# Altium PCB dtb-222-AW1.PcbDoc
Units mm, origin at the board's own origin, x right, y up, seen from the top; angles counter-clockwise.
Board outline 144.78 x 140.44 mm, 4 copper layers (Top Layer, Ground, Layer 2, Bottom Layer), stack 1.544 mm thick; 51 components, 62 nets, 219 pads, 11 vias.
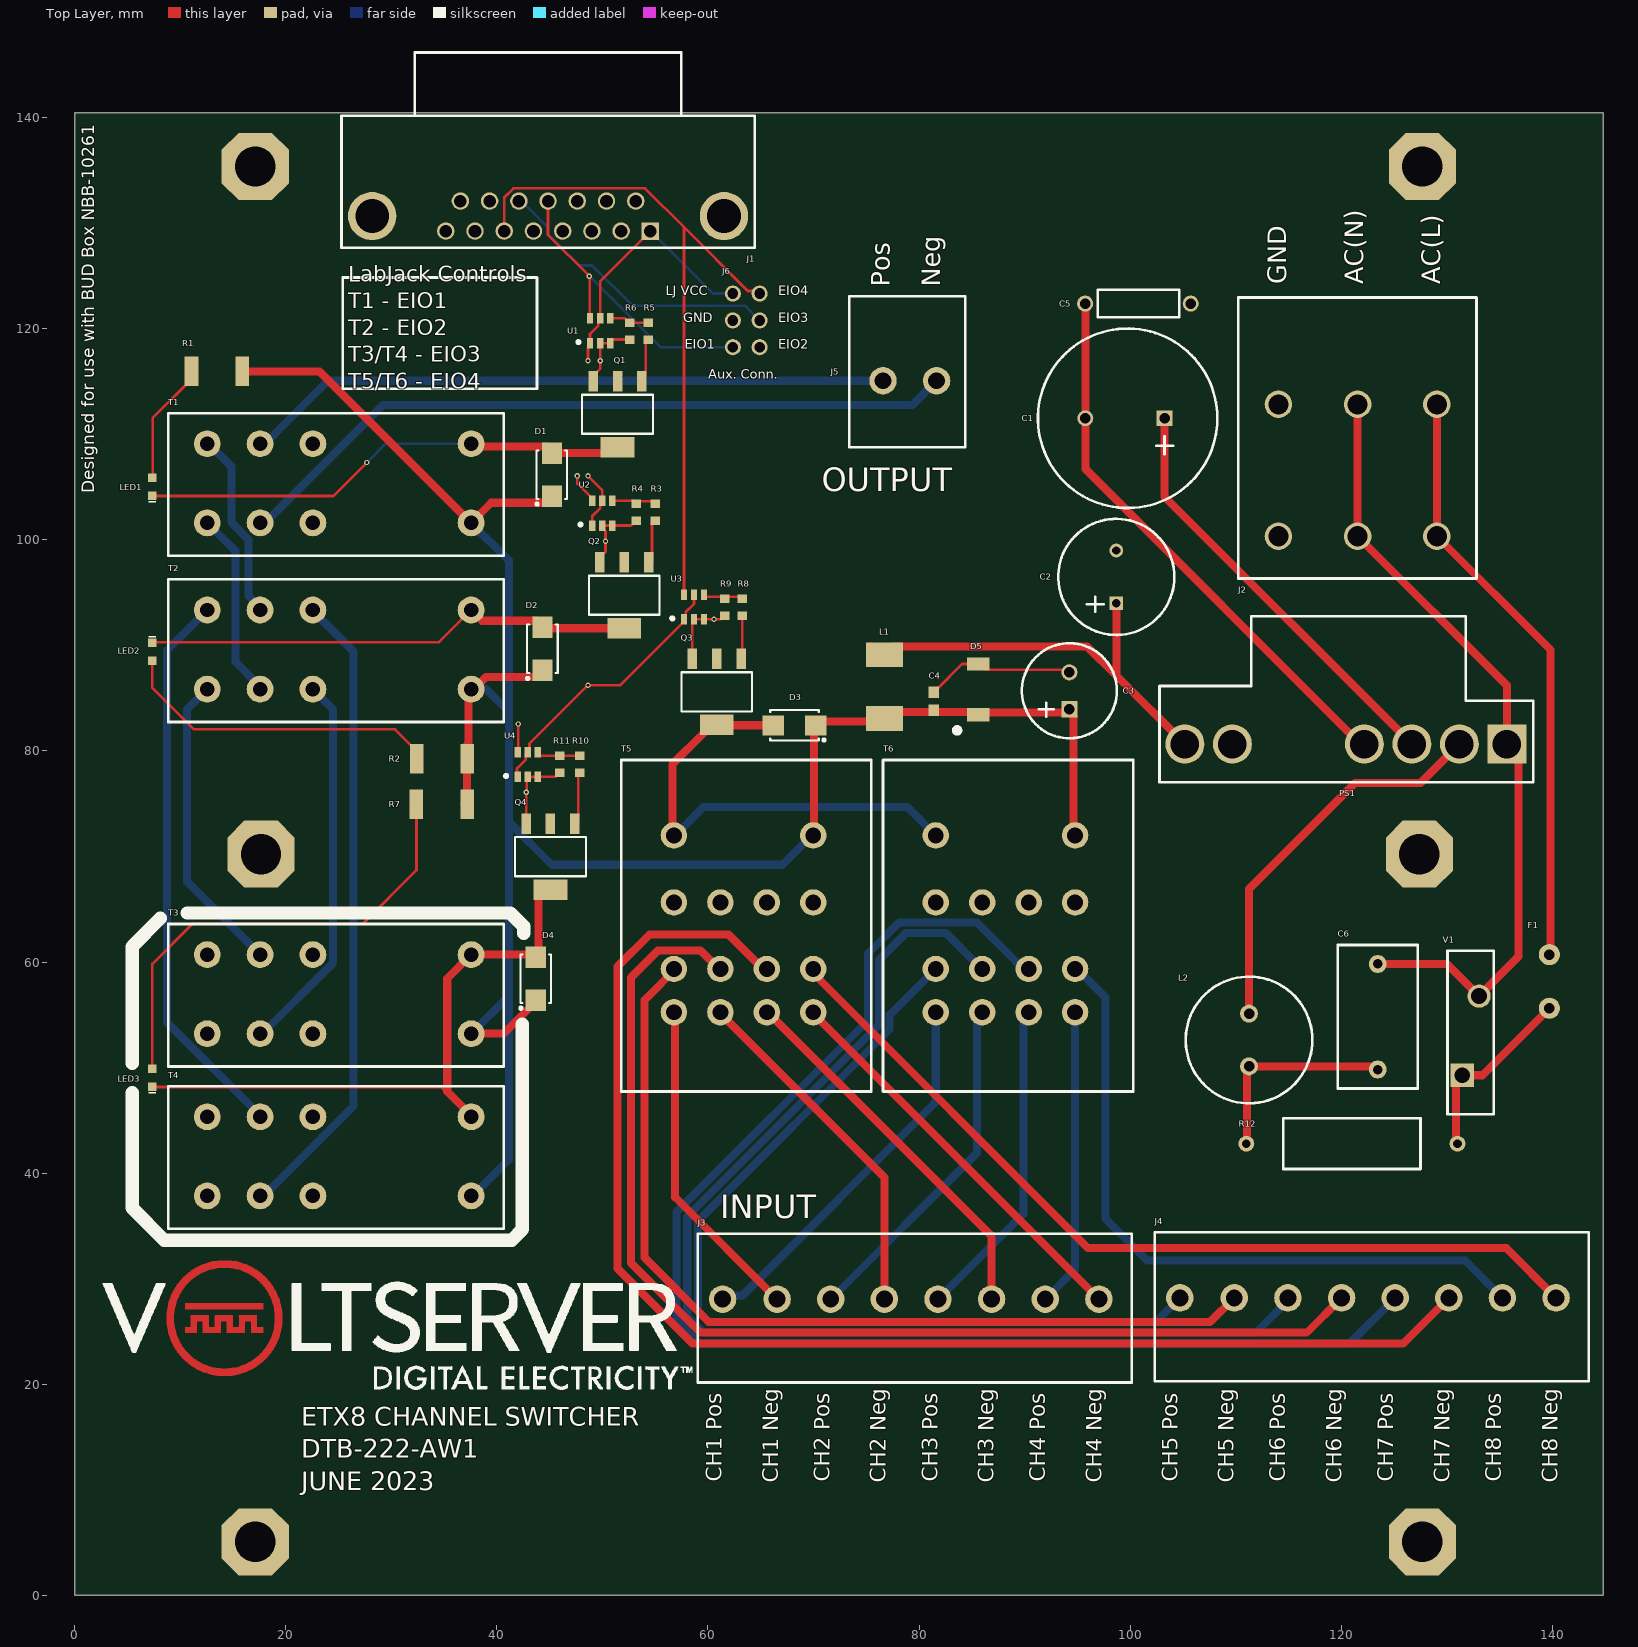
[diagram p0: Top Layer view]
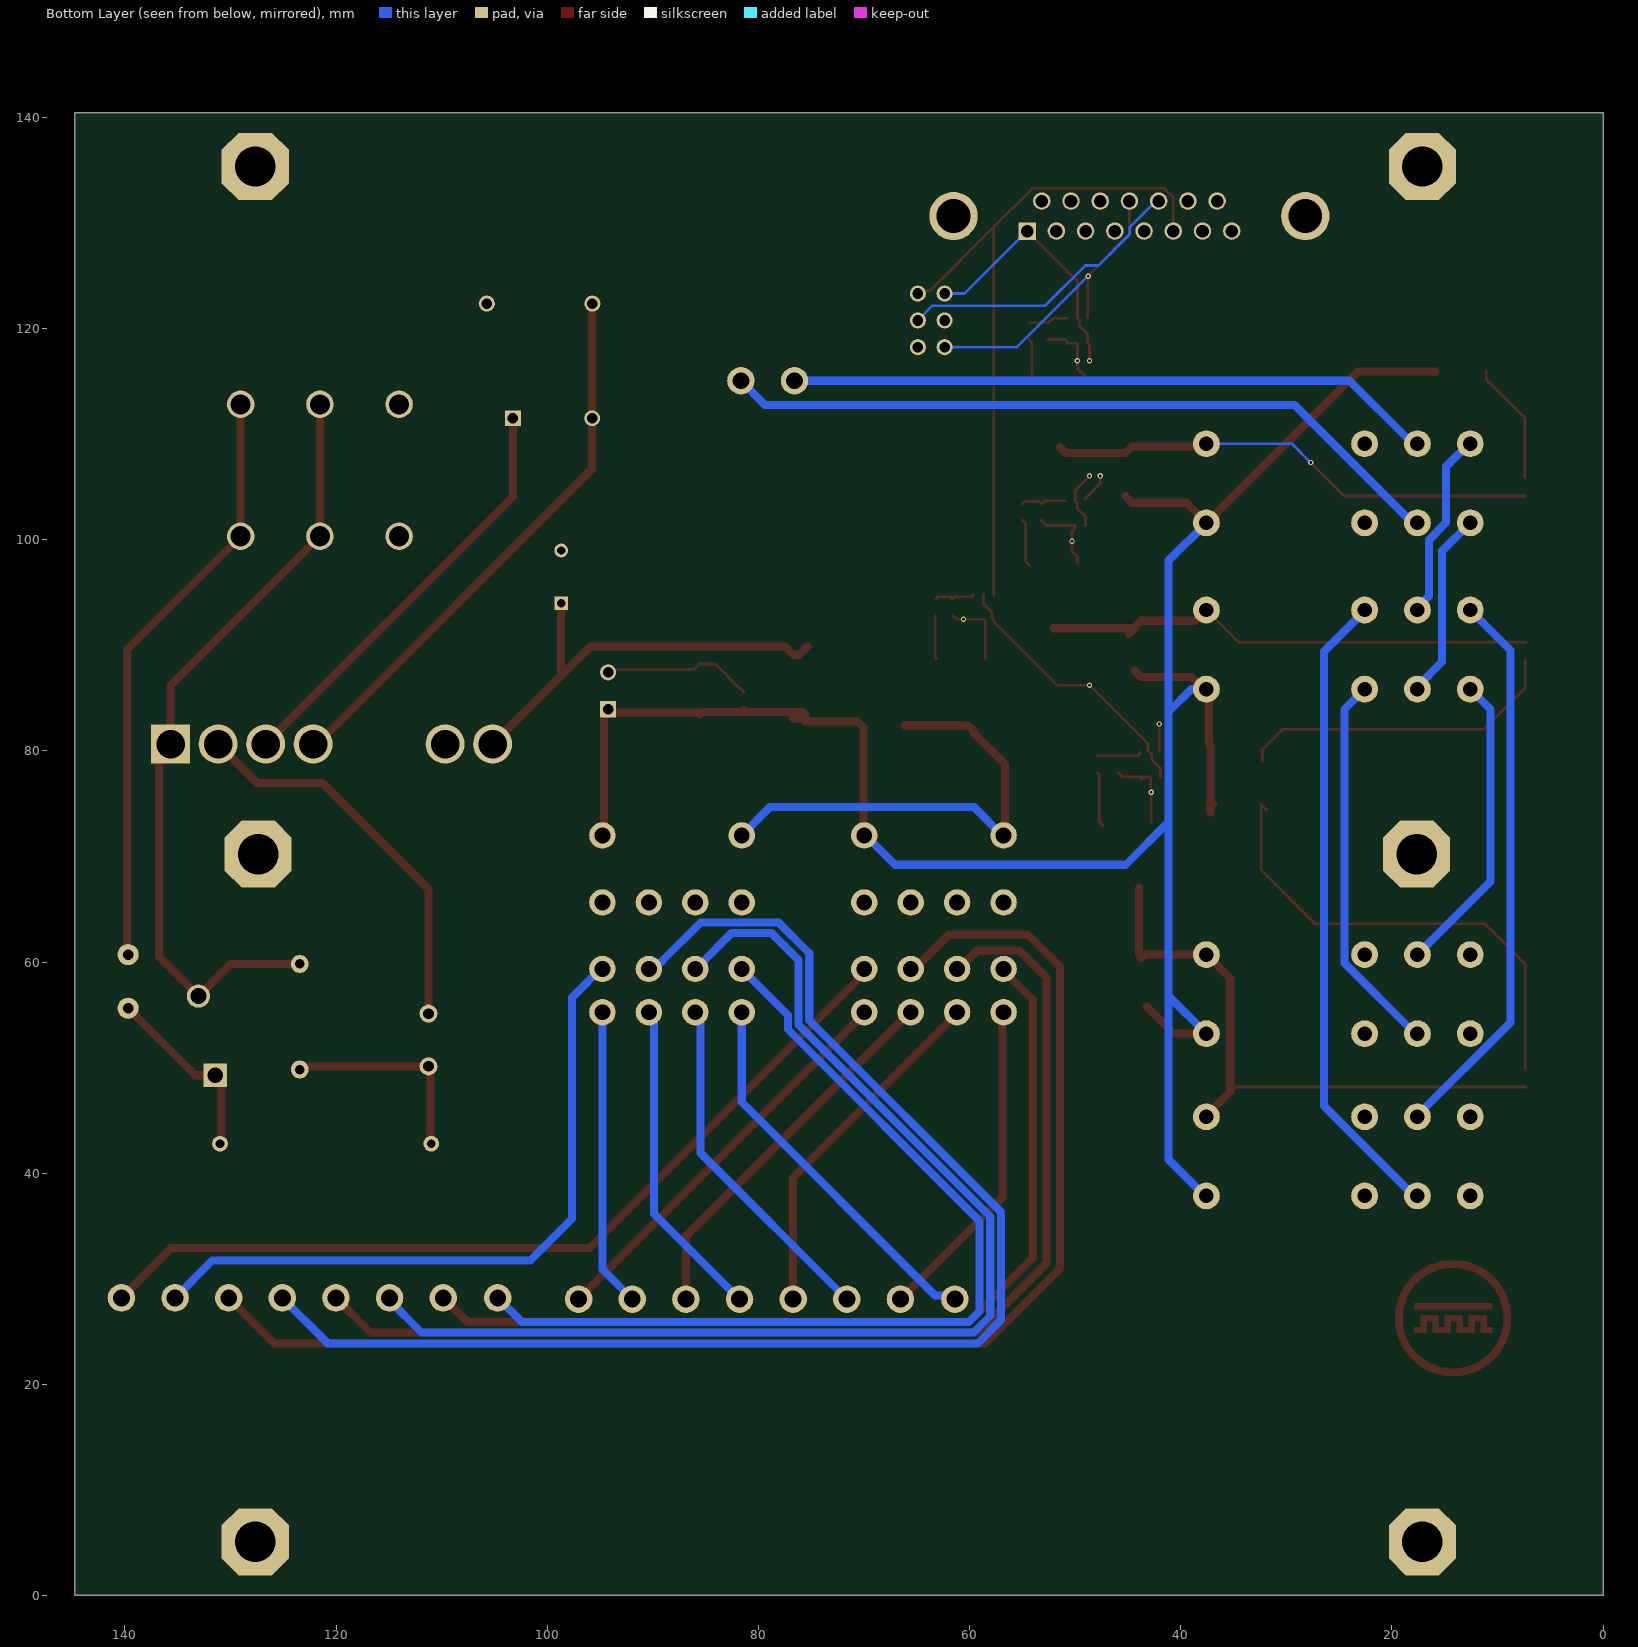
[diagram p1: Bottom Layer view, seen from below]
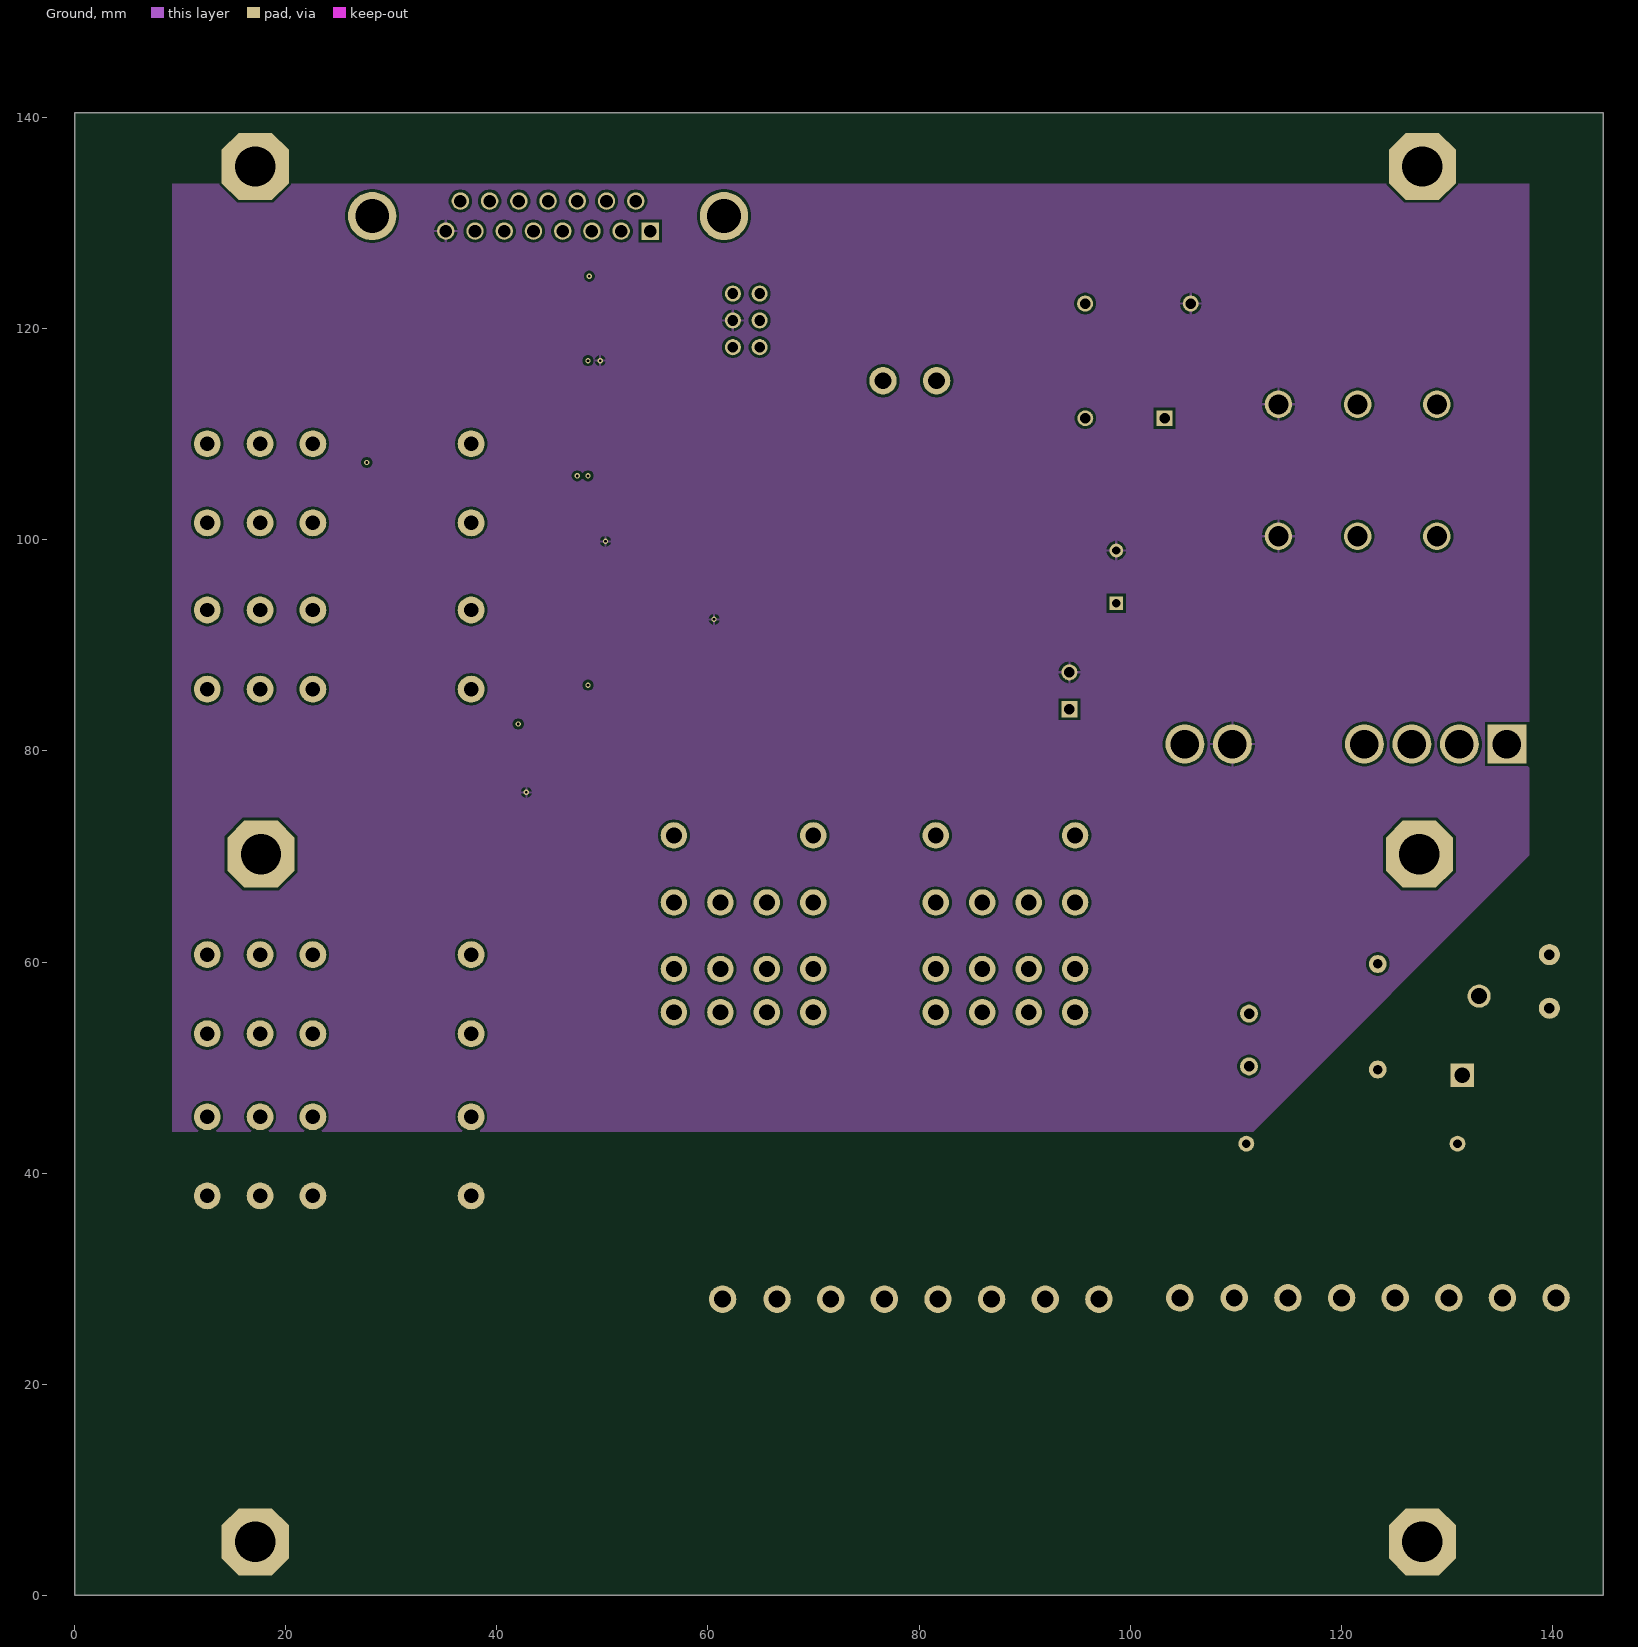
[diagram p2: Ground]
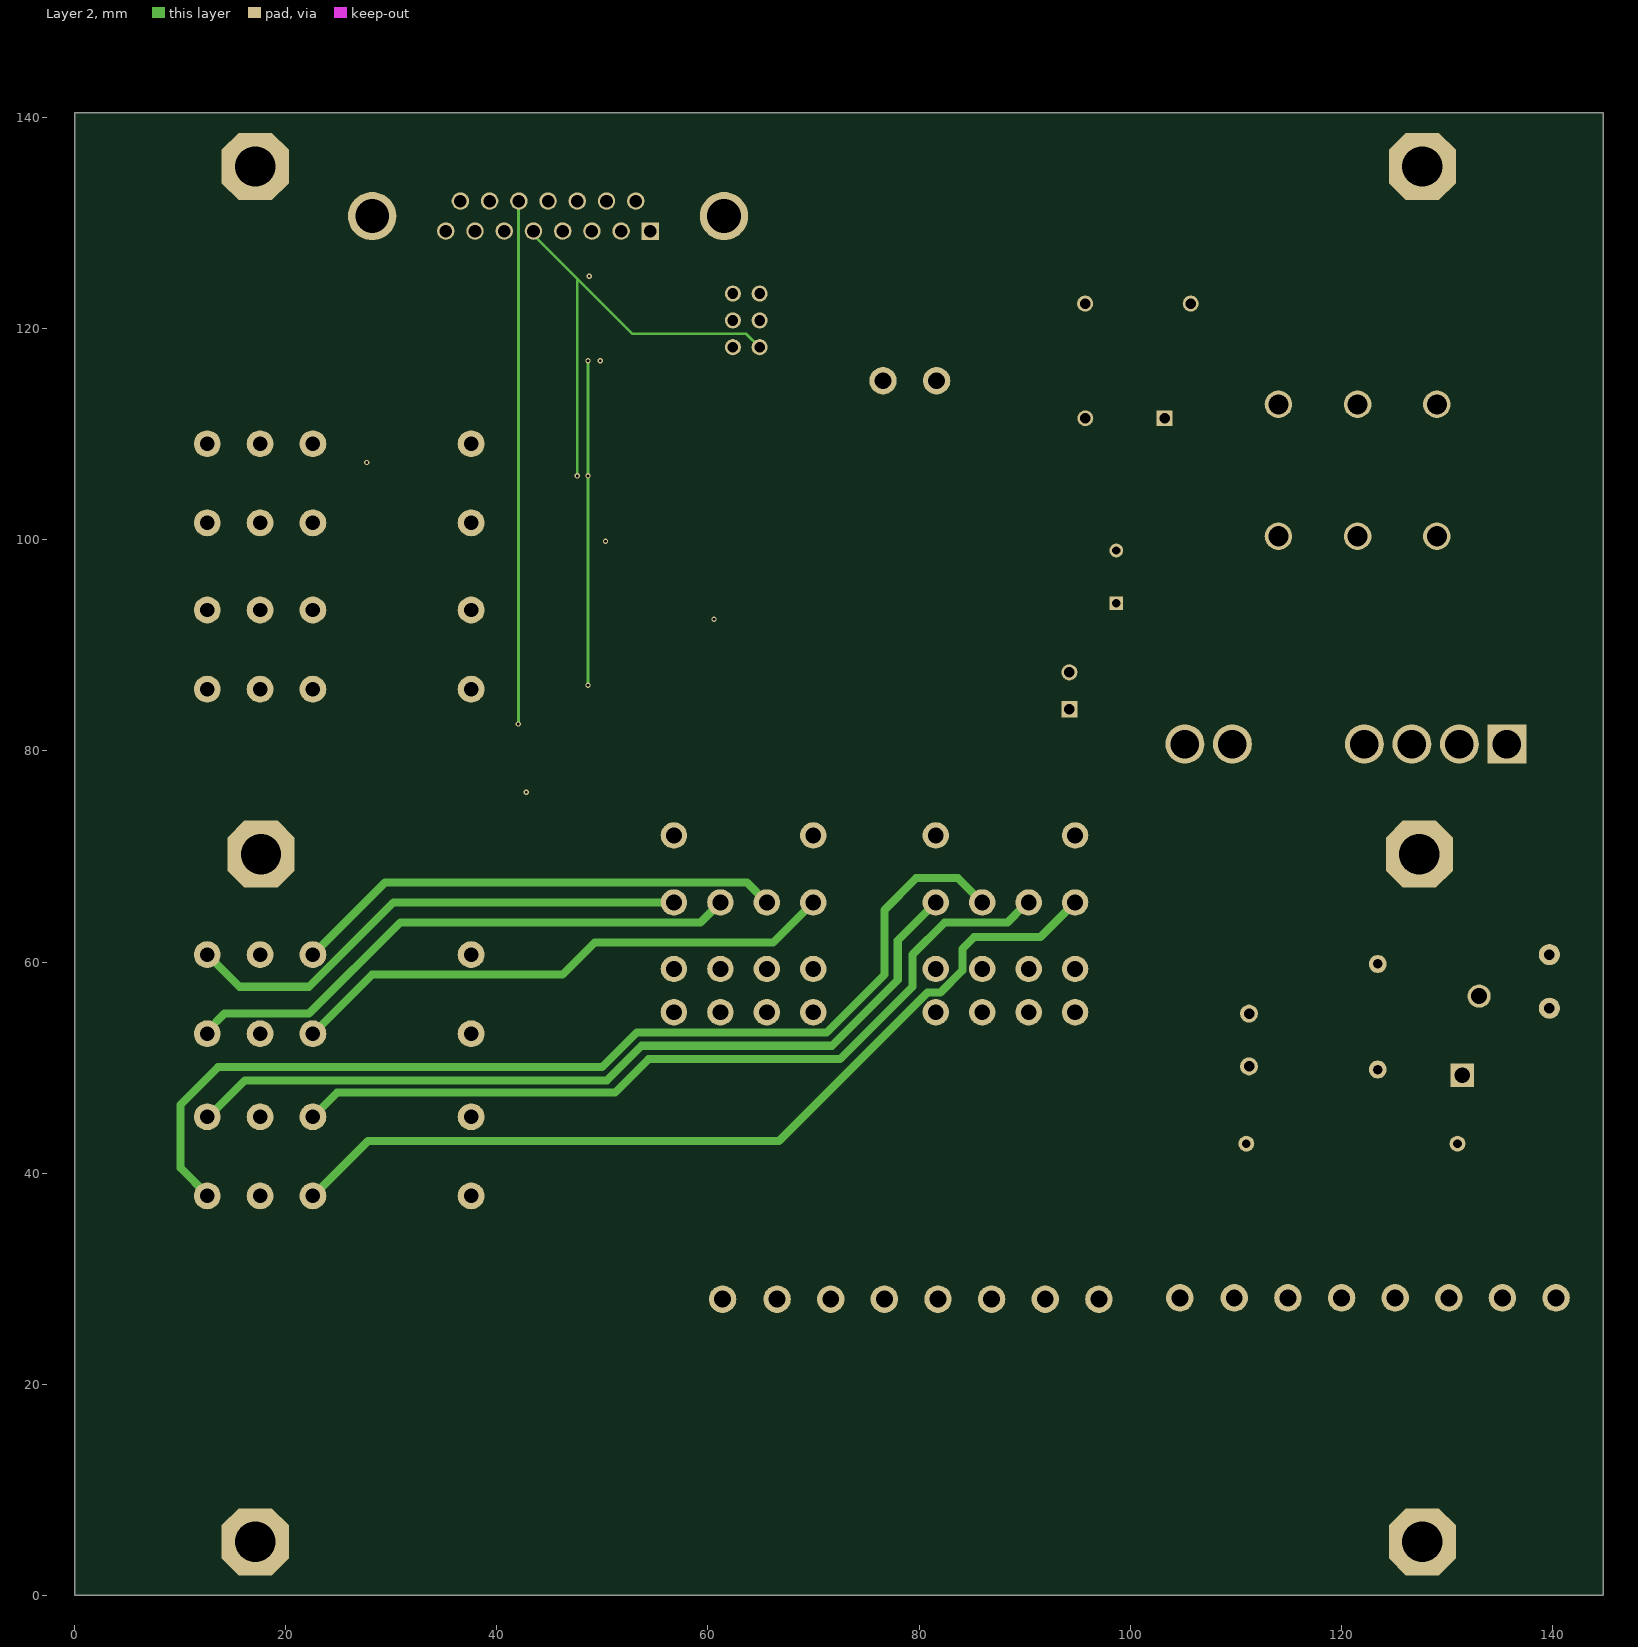
[diagram p3: Layer 2]
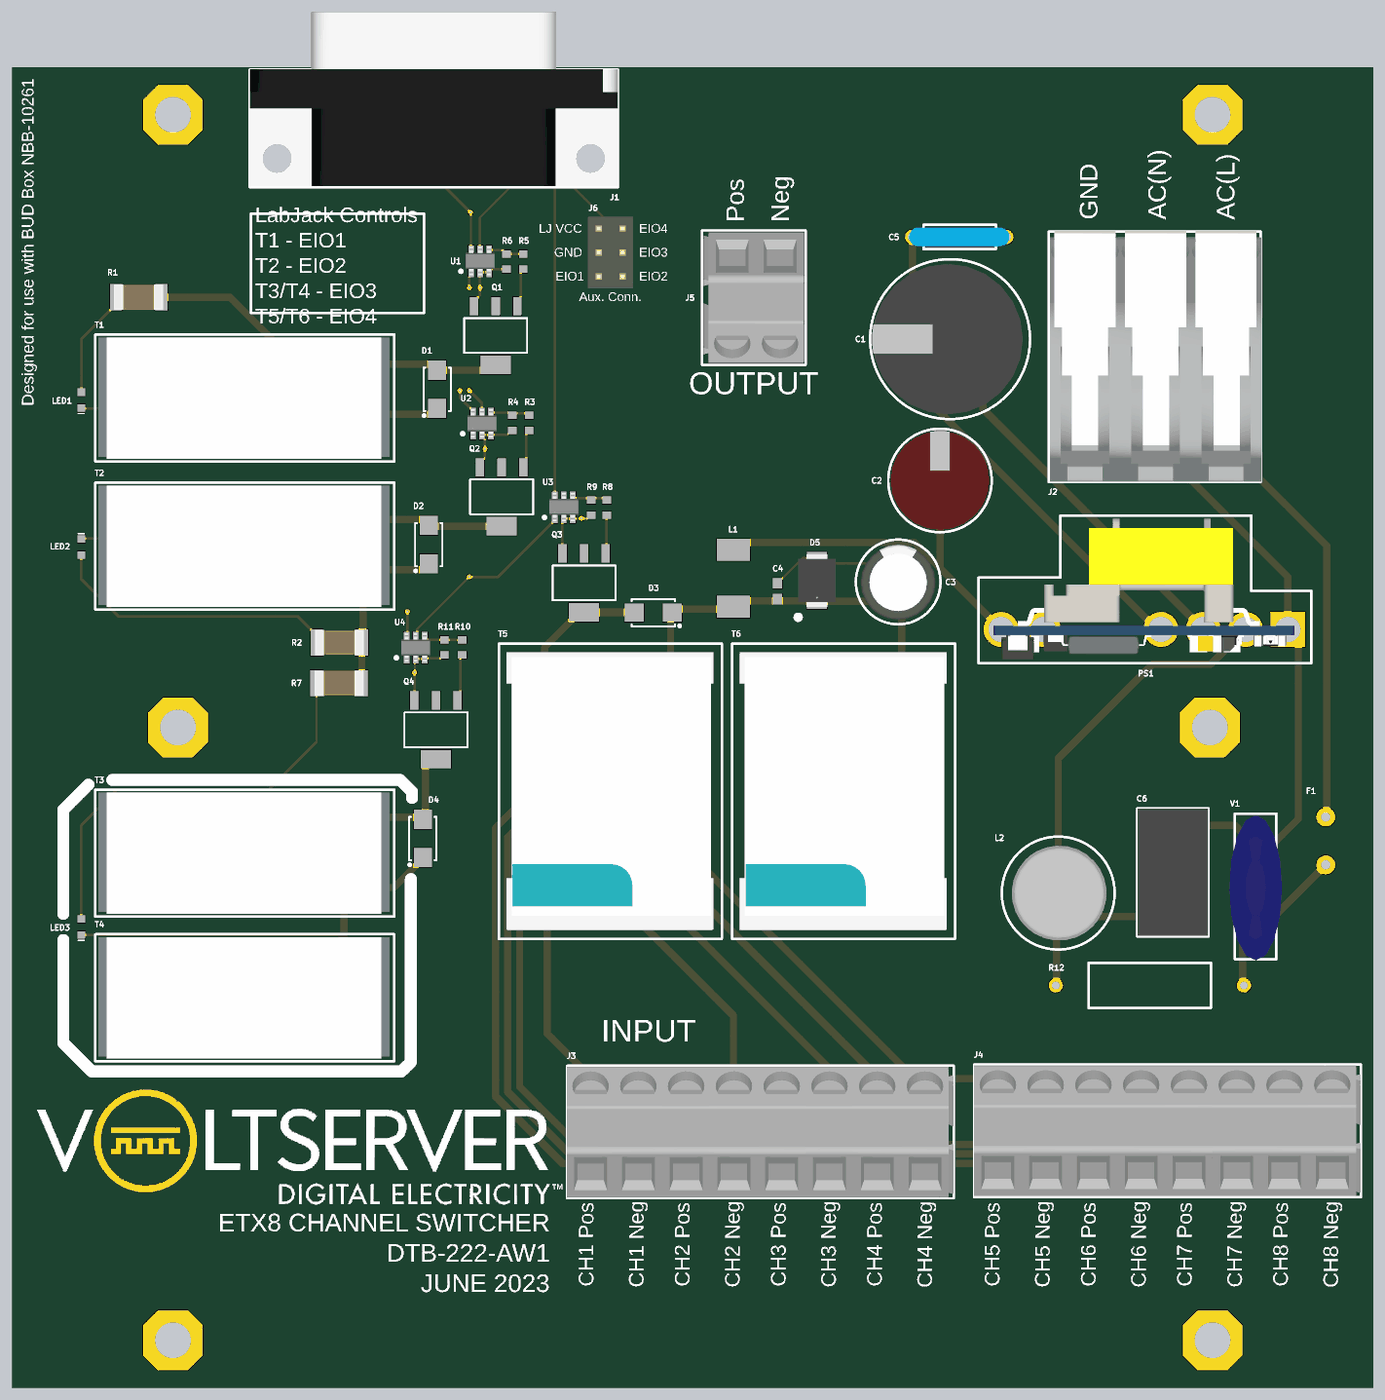
[diagram p4: 3D render of the assembled board from above, using the file's embedded part models]

## Layer stack, top to bottom
Top Solder: solder mask 0.0102, Solder Resist, Dk 3.5
Top Layer: signal copper 0.0356
Dielectric 2: prepreg 0.2311, PP-006, Dk 4.1
Ground: signal copper 0.0356
Dielectric 1: dielectric 0.9398, FR-4, Dk 4.8
Layer 2: signal copper 0.0356
Dielectric 3: prepreg 0.2311, PP-006, Dk 4.1
Bottom Layer: signal copper 0.0356
Bottom Solder: solder mask 0.0102, Solder Resist, Dk 3.5

## Board outline
0,0 0,140.437 144.78,140.437 144.78,0

## Design rules (kind name [scope] priority, off if disabled: settings)
Clearance [All] p1: gap=0.254 ignorepadtopadclearanceinfootprint=FALSE except(0: Arc-Hole Track-Hole SMDPad-Hole THPad-Hole Via-Hole Fill-Hole Poly-Hole Region-Hole Text-Hole)
Height [All] p1: minheight=0 maxheight=50.8 prefheight=12.7
HoleSize [All] p1: absolutevalues=TRUE maxlimit=5.08 minlimit=0.025 maxpercent=80.000 minpercent=20.000
MinimumSolderMaskSliver [All] p1: minsoldermaskwidth=0.127
PolygonConnect [All] p1: connectstyle=Relief reliefconductorwidth=0.254 reliefentries=4 polygonreliefangle="90 Angle" airgapwidth=0.254
RoutingVias [All] p1: holewidth=0.254 width=0.508 viastyle="Through Hole" minholewidth=0.254 minwidth=0.508 maxholewidth=0.711 maxwidth=1.27
SilkToSilkClearance [All] p1: silktosilkclearance=0.127
SilkToSolderMaskClearance [IsPad] p1: minsilkscreentomaskgap=0.127 clearancetoexposedcopper=TRUE
SolderMaskExpansion [All] p1: expansion=0.102 istentingtop=FALSE
Width [All] p1: maxlimit=1.27 minlimit=0.254 preferedwidth=0.254
25 further rules are at their usual default settings.

## Classes and differential pairs
component class dtb-222-relays: D1 D2 D3 D4 LED1 LED2 LED3 Q1 Q2 Q3 Q4 R1 R2 R3 R4 R5 R6 R7 R8 R9 R10 R11 T1 T2 T3 T4 T5 T6 U1 U2 U3 U4
component class dtb-222-connectors: J1 J2 J3 J4 J5 J6
component class dtb-222-24V-supply: C1 C2 C3 C4 C5 C6 D5 F1 L1 L2 PS1 R12 V1

## Components (designator, comment, footprint, x,y, rotation, side; value= is the part's Value field where it differs from the comment)
C1 "ECA-2WHG220" ECA-2WHG220 103.251,111.506 r180 top value="22 uF 450V"
C2 "35PX470MEFC10X12.5" 35PX470MEFC10X12.5 98.679,93.98 r90 top value="470 uF 35V"
C3 "ECA-1HM101B" ECA-1HM101B 94.234,83.947 r90 top value="100 uF 50V"
C4 "CGA3E2X7R1H104K080AE" "Standard VoltServer 0603 Capacitor Footprint" 81.407,84.709 r270 top value="0.1uF 50V"
C5 "CAP CER 1000PF 440VAC RADIAL" CD45-E2GA102M-VKA 95.729,122.373 r0 top
C6 "CAP FILM 0.1UF 10%" 890334023023CS 123.444,49.817 r90 top value="0.1 UF 310 VAC"
D1 "ES1J" ES1J 45.212,106.172 r90 top value="600V 1A"
D2 "ES1J" ES1J 44.323,89.662 r90 top value="600V 1A"
D3 "ES1J" ES1J 68.199,82.423 r180 top value="600V 1A"
D4 "ES1J" ES1J 43.688,58.42 r90 top value="600V 1A"
D5 "TVS DIODE 30VWM 48.4VC SMB" SMBJ30A 85.598,83.439 r90 top value="TVS Diode 30VWM"
F1 "2 A 300 V AC DC" SS-5H-2A-APH 139.7,60.706 r270 top value="FUSE BOARD MNT 2A 300VAC RADIAL"
J1 "DB15 Horizontal" 182-015-113R531 54.546,129.235 r180 top value="DB 16 Male"
J2 "2706-103" 2706-103 129.039,112.83 r180 top value="3-Pos Terminal Block Horizontal"
J3 "8 Pos Terminal Block Screw Type" TB008A-508-08BE 97.028,28.067 r180 top value="8 pos screw terminal"
J4 "8 Pos Terminal Block Screw Type" TB008A-508-08BE 140.335,28.194 r180 top value="8 pos screw terminal"
J5 "2 Pos Terminal Block Screw Type" TB008A-508-02BE 76.581,115.062 r0 top value="2 pos screw terminal"
J6 "6POS 0.100' Header" 67997-206HLF 62.357,123.317 r270 top value="CONN HEADER VERT 6POS 2.54MM"
L1 "FIXED IND 2.2UH 9.3A 15MOHM SMD" 0630CDMCCDS-2R2MC 76.708,89.108 r270 top value="2.2uH 9.3A"
L2 "FIXED IND 2.2MH 350MA 3.2 OHM TH" RLB1112V4-222J 111.252,50.118 r90 top value="2.2mH 350mA"
LED1 "APT1608LVBC/D" "Standard VoltServer 0603 Kingbright HELI2 LED Footprint" 7.366,105.029 r270 top locked value=Blue
LED2 "APT1608LVBC/D" "Standard VoltServer 0603 Kingbright HELI2 LED Footprint" 7.366,89.408 r90 top locked value=Blue
LED3 "APT1608LVBC/D" "Standard VoltServer 0603 Kingbright HELI2 LED Footprint" 7.366,49.022 r270 top locked value=Blue
PS1 "AC/DC CONVERTER 24V 10W" LS10-13B24R3 135.674,80.645 r180 top
Q1 "FQT1N60CTF-WS" FQT1N60CTF_WS 51.435,111.887 r270 top value="600V 200mA"
Q2 "FQT1N60CTF-WS" FQT1N60CTF_WS 52.07,94.742 r270 top value="600V 200mA"
Q3 "FQT1N60CTF-WS" FQT1N60CTF_WS 60.833,85.598 r270 top value="600V 200mA"
Q4 "FQT1N60CTF-WS" FQT1N60CTF_WS 45.085,69.977 r270 top value="600V 200mA"
R1 "RES 1.2K OHM 5% 3/4W 2010" "2010 Resistor" 11.074,115.951 r0 top value="1.2 kOhm, +/- 5%, 0.75W"
R2 "RES 1.2K OHM 5% 3/4W 2010" "2010 Resistor" 32.41,79.248 r0 top value="1.2 kOhm, +/- 5%, 0.75W"
R3 "ERA-3AEB102V" "Standard VoltServer 0603 Resistor Footprint" 54.991,102.616 r90 top value="1K 0.1%"
R4 "ERA-3AEB203V" "Standard VoltServer 0603 Resistor Footprint" 53.213,102.616 r90 top value="20K 0.1%"
R5 "ERA-3AEB102V" "Standard VoltServer 0603 Resistor Footprint" 54.356,119.761 r90 top value="1K 0.1%"
R6 "ERA-3AEB203V" "Standard VoltServer 0603 Resistor Footprint" 52.578,119.761 r90 top value="20K 0.1%"
R7 "RES 1.2K OHM 5% 3/4W 2010" "2010 Resistor" 32.385,74.93 r0 top value="1.2 kOhm, +/- 5%, 0.75W"
R8 "ERA-3AEB102V" "Standard VoltServer 0603 Resistor Footprint" 63.246,93.599 r90 top value="1K 0.1%"
R9 "ERA-3AEB203V" "Standard VoltServer 0603 Resistor Footprint" 61.595,93.599 r90 top value="20K 0.1%"
R10 "ERA-3AEB102V" "Standard VoltServer 0603 Resistor Footprint" 47.879,78.74 r90 top value="1K 0.1%"
R11 "ERA-3AEB203V" "Standard VoltServer 0603 Resistor Footprint" 45.974,78.74 r90 top value="20K 0.1%"
R12 "RES 6.8 OHM 3W 5% AXIAL" AC03000006808JAC00 130.998,42.799 r180 top value="6.8 Ohm, 3 W"
T1 "RELAY DPDT 8A 24V" 2961435 37.567,109.093 r270 top locked value="DPDT Relay"
T2 "RELAY DPDT 8A 24V" 2961435 37.567,93.345 r270 top locked value="DPDT Relay"
T3 "RELAY DPDT 8A 24V" 2961435 37.567,60.706 r270 top locked value="DPDT Relay"
T4 "RELAY DPDT 8A 24V" 2961435 37.567,45.339 r270 top locked value="DPDT Relay"
T5 "4PDT Relay" 2903677 69.977,55.245 r180 top locked value="4PDT Relay with Socket"
T6 "4PDT Relay" 2903677 94.779,55.245 r180 top locked value="4PDT Relay with Socket"
U1 "1 x 2:1 MUX" 74LVC1G157GV,125 48.834,118.618 r90 top
U2 "1 x 2:1 MUX" 74LVC1G157GV,125 49.027,101.346 r90 top
U3 "1 x 2:1 MUX" 74LVC1G157GV,125 57.724,92.456 r90 top
U4 "1 x 2:1 MUX" 74LVC1G157GV,125 41.976,77.533 r90 top
V1 "VARISTOR DISC 14MM" B72214S0351K101 131.445,49.276 r90 top value="560 V 4.5 kA Varistor"

## Footprints (in the part's own frame and the unit in brackets; to place one, negate y for a bottom-side part, rotate by r counter-clockwise, add the part's x,y. Pads: shape width x height; smd on the part's side, far side on the other; paste and mask are expansions set on the pad)
35PX470MEFC10X12.5 [mm]
  rect 1.3x1.3 hole 0.8: 1(0,0)
  round 1.3 hole 0.8: 2(5,0)
  silkscreen extent -3,-5.5 8,5.5, body extent -2.75,-5.24 7.77,5.24, height 14.01
74LVC1G157GV,125 [mm] "1 x 2:1 MUX"
  rect 1x0.6 smd: 1(0,0) 2(0,-0.95) 3(0,-1.9) 4(2.35,-1.9) 5(2.35,-0.95) 6(2.35,0)
  silkscreen extent -0.04,0.96 0.24,1.24, body extent -0.3,-2.5 2.7,0.6, height 1.09
182-015-113R531 [mil] "DB15"
  round 180 hole 126: 0(-274.5,-56) 0(1037.5,-56)
  rect 65x65 hole 47: 1(0,0)
  round 65 hole 47: 2(109,0) 3(218,0) 4(327,0) 5(436,0) 6(545,0) 7(654,0) 8(763,0) 9(54.5,-112) 10(163.5,-112) 11(272.5,-112) 12(381.5,-112) 13(490.5,-112) 14(599.5,-112) 15(708.5,-112)
  silkscreen extent -389,-666 1152,62, body extent -389,-670 1152,58, height 494
0630CDMCCDS-2R2MC [mm]
  rect 2.35x3.5 smd: 1(0,0) 2(6.05,0)
  body extent -0.45,-3.4 6.65,3.2, height 2.8
"2010 Resistor" [mil]
  rect 51x110 smd: 1(0,0) 2(189,0)
  body extent -8,-53 197,53, height 28
2706-103 [mm]
  round 2.6 hole 1.9: 1(0,12.5) 1(0,0) 2(7.5,12.5) 2(7.5,0) 3(15,12.5) 3(15,0)
  silkscreen extent -3.75,-10.11 18.8,16.5, body extent -3.81,-10.16 18.69,16.47, height 25.5
67997-206HLF [mil]
  round 60 hole 40: 1(0,0) 2(100,0) 3(200,0) 4(200,100) 5(100,100) 6(0,100)
  body extent -48,-44 252,146, height 330
2903677 [mm] "4PDT Relay"
  round 2.5 hole 1.5: 1(0,-16.75) 2(13.2,-16.75) 3(0,-10.4) 4(4.4,-10.4) 5(8.8,-10.4) 6(13.2,-10.4) 7(0,-4.1) 8(4.4,-4.1) 9(8.8,-4.1) 10(13.2,-4.1) 11(0,0) 12(4.4,0) 13(8.8,0) 14(13.2,0)
  silkscreen extent -5.5,-23.9 18.2,7.5, body extent -4.6,-22.95 17.4,6.55, height 47.85
2961435 [mil] "2961435 Relay with R95-132 Socket"
  round 100 hole 54: 1(0,0) 2(0,-590) 3(0,-787) 4(0,-984) 5(295,-984) 6(295,-787) 7(295,-590) 8(295,0)
  silkscreen extent -114,-1130 417,122, body extent -102,-1118 406,102, height 970
890334023023CS [mm]
  round 1.7 hole 0.9: 1(0,0) 2(10,0)
  silkscreen extent -1.8,-3.8 11.8,3.8, body extent -1.76,-3.75 11.76,3.75, height 13.51
AC03000006808JAC00 [mm]
  round 1.5 hole 0.83: 1(0,0) 2(20,0)
  silkscreen extent 3.5,-2.4 16.5,2.4, body extent -0.2,-2.4 20.2,2.4, height 12.8
B72214S0351K101 [mm]
  rect 2.2x2.2 hole 1.5: 1(0,0)
  round 2.2 hole 1.5: 2(7.5,-1.6)
  silkscreen extent -3.7,-3 11.8,1.4, body extent -3.85,-3.6 11.65,1.99, height 19
CD45-E2GA102M-VKA [mil]
  round 60 hole 39.37: 1(0,0) 2(393.7,0)
  silkscreen extent 47,-51 350,51, body extent -12,-39 406,39, height 484
ECA-1HM101B [mil]
  rect 60x60 hole 39.37: 1(0,0)
  round 60 hole 39.37: 2(137.8,0)
  silkscreen extent -108,-177 246,177, body extent -91,-157 224,157, height 453
ECA-2WHG220 [mm]
  rect 1.5x1.5 hole 1: 1(0,0)
  round 1.5 hole 1: 2(7.5,0)
  silkscreen extent -5,-8.5 12,8.5, body extent -4.24,-8 11.8,8, height 25.03
ES1J [mil] "DIODE FAST REC 600V 1A SMA"
  rect 80x75 smd: 1(-80,0) 2(80,0)
  silkscreen extent -115,-57 91,60, body extent -91,-57 91,57, height 96
FQT1N60CTF_WS [mm] "SOT223, 4-Leads, Body 6.50x7.00mm (avg), Pitch 2.30mm, IPC Medium Density"
  rect 1.95x0.9 smd: 1(-3.125,2.3) 2(-3.125,0) 3(-3.125,-2.3)
  rect 1.95x3.2 smd: 4(3.125,0)
  silkscreen extent -1.85,-3.35 1.85,3.35, body extent -1.85,-3.35 1.85,3.35, height 1.8
LS10-13B24R3 [mm]
  rect 3.7x3.7 hole 2.7: 1(0,0)
  round 3.7 hole 2.7: 2(4.5,0) 3(9,0) 4(13.5,0) 5(26,0) 6(30.5,0)
  silkscreen extent -2.5,-12.1 32.9,3.6, body extent -0.7,-11.82 31.3,3.22, height 17.2
RLB1112V4-222J [mm]
  round 1.7 hole 1: 1(0,0) 2(5,0)
  silkscreen extent -3.5,-6 8.5,6, body extent -4.66,-7.26 9.66,7.06, height 14.2
SMBJ30A [mm]
  rect 1.27x2.1 smd: 1(0,0) 2(4.79,0)
  silkscreen extent -1.75,1.75 -1.25,2.25, body extent -0.39,-1.98 5.19,1.98, height 2.64
SS-5H-2A-APH [mm]
  round 2 hole 1: 1(0,0) 2(5.08,0)
  body extent -1.85,-2.15 6.85,2.35, height 8.55
"Standard VoltServer 0603 Capacitor Footprint" [mm] "Chip Capacitor; Body 1.6 x 0.8 mm (LxW typ)"
  rect 1.1x1 smd: 1(-0.85,0) 2(0.85,0)
  body extent -0.8,-0.4 0.8,0.4, height 0.9
"Standard VoltServer 0603 Kingbright HELI2 LED Footprint" [mm] "Chip LED, Body 1.6 x 0.8 mm (LxW typ)"
  rect 0.8x0.8 smd: 1(-0.85,0) 2(0.85,0)
  silkscreen extent 1.43,-0.33 1.43,0.33, body extent -0.8,-0.4 0.8,0.4, height 0.75
"Standard VoltServer 0603 Resistor Footprint" [mm] "Chip Resistor; Body 1.6 x 0.8 mm (LxW typ)"
  rect 0.8x0.9 smd: 1(-0.8,0) 2(0.8,0)
  body extent -0.8,-0.4 0.8,0.4, height 0.55
TB008A-508-02BE [mm]
  round 2.6 hole 1.6: 1(0,0) 2(5.08,0)
  silkscreen extent -3.2,-6.3 7.8,8, body extent -3.03,-6.1 7.63,7.79, height 15.82
TB008A-508-08BE [mm]
  round 2.6 hole 1.6: 1(0,0) 2(5.08,0) 3(10.16,0) 4(15.24,0) 5(20.32,0) 6(25.4,0) 7(30.48,0) 8(35.64,0)
  silkscreen extent -3.1,-6.2 38,7.9, body extent -3.1,-6.1 38.04,7.79, height 15.82

## Part data
C1: "22 µF 450 V Aluminum Electrolytic Capacitors Radial, Can 2000 Hrs @ 105°C", Manufacturer="Panasonic Electronic Components", Manufacturer PN=ECA-2WHG220, Vendor=Digikey, Vendor PN=P5877-ND
C2: "470 µF 35 V Aluminum Electrolytic Capacitors Radial, Can 2000 Hrs @ 105°C", Manufacturer=Rubycon, Manufacturer PN=35PX470MEFC10X12.5, Vendor=Digikey, Vendor PN=1189-1280-ND
C3: "100 µF 20% 50 V Aluminum Electrolytic Capacitors Radial, Can 2000 Hrs @ 85°C", Manufacturer="Panasonic Electronic Components", Manufacturer PN=ECA-1HM101B, Vendor=Digikey, Vendor PN=P10397TB-ND
C4: "CAP CER 0.1UF 50V 10% X7R 0603", Manufacturer=TDK, Manufacturer PN=CGA3E2X7R1H104K080AE, Vendor=Digikey, Vendor PN=445-15957-1-ND
C5: library part CD45-E2GA102M-VKA, "1000 pF ±20% 440VAC Ceramic Capacitor E Radial, Disc", Manufacturer="TDK Corporation", Manufacturer PN=CD45-E2GA102M-VKA, Vendor=Digi-Key, Vendor PN=445-175355-1-ND
C6: library part 890334023023CS, "0.1 µF Film Capacitor 310V Polypropylene (PP), Metallized Radial", Manufacturer="Wurth Elektronik", Manufacturer PN=890334023023CS, Vendor=Digikey, Vendor PN=732-5733-ND
D1 D2 D3 D4: "DIODE 1A 600V 35nS SMA", Manufacturer=Fairchild, Manufacturer PN=ES1J, Vendor=Digikey, Vendor PN=ES1JFSCT-ND
D5: library part SMBJ30A, "48.4V Clamp 12.4A Ipp Tvs Diode Surface Mount SMB (DO-214AA)", Manufacturer="Bourns Inc.", Manufacturer PN=SMBJ30A, Vendor=Digikey, Vendor PN=SMBJ30ABTR-ND
F1: library part SS-5H-2A-APH, "2 A 300 V AC DC Fuse Board Mount (Cartridge Style Excluded) Through Hole Radial, Box", Manufacturer=Eaton, Manufacturer PN=SS-5H-2A-APH, Vendor=Digi-Key, Vendor PN=283-4166-1-ND
J1: library part "DB15 LabJack Pinout", "15 Position D-Sub Plug, Male Pins Connector", Manufacturer="NorComp Inc.", Manufacturer PN=182-015-113R531, Vendor=Digikey, Vendor PN=182-15ME-ND
J2: "3 Position Wire to Board Terminal Block Horizontal with Board 0.295\" (7.50mm) Through Hole", Manufacturer="WAGO Corporation", Manufacturer PN=2706-103, Vendor=Digi-Key, Vendor PN=2946-2706-103-ND
J3 J4: library part TB008A-508-08BE, "8 Position Wire to Board Terminal Block 45° (135°) Angle with Board 0.200\" (5.08mm) Through Hole", Manufacturer="CUI Devices", Manufacturer PN=TB008A-508-08DE, Vendor=Digi-Key, Vendor PN=102-6216-ND
J5: library part TB008A-508-02BE, "2 Position Wire to Board Terminal Block 45° (135°) Angle with Board 0.200\" (5.08mm) Through Hole", Manufacturer="CUI Devices", Manufacturer PN=TB008A-508-02DE, Vendor=Digi-Key, Vendor PN=102-6213-ND
J6: library part 67997-206HLF, "Connector Header Through Hole 6 position 0.100\" (2.54mm)", Manufacturer="Amphenol ICC (FCI)", Manufacturer PN=67997-206HLF, Vendor=Digi-Key, Vendor PN=609-3234-ND
L1: library part 0630CDMCCDS-2R2MC, "2.2 µH Shielded Molded Inductor 9.3 A 15mOhm Max Nonstandard", Manufacturer="Sumida America Components Inc.", Manufacturer PN=0630CDMCCDS-2R2MC, Vendor=Digikey, Vendor PN=308-2464-6-ND
L2: library part RLB1112V4-222J, "2.2 mH Unshielded Drum Core, Wirewound Inductor 350 mA 3.2Ohm Max Radial, Vertical Cylinder", Manufacturer="Bourns Inc.", Manufacturer PN=RLB1112V4-222J, Vendor=Digikey, Vendor PN=118-RLB1112V4-222JTR-ND
LED1 LED2 LED3: "Blue 470nm LED Indication - Discrete 2.65V 0603 (1608 Metric)", Manufacturer=Kingbright, Manufacturer PN=APT1608LVBC/D, Vendor=Digikey, Vendor PN=754-1933-1-ND
PS1: library part LS10-13B24R3, "Open Frame AC DC Converters 1 Output 24V 420mA 85 ~ 305 VAC, 100 ~ 430 VDC Input", Manufacturer="Mornsun America, LLC", Manufacturer PN=LS10-13B24R3, Vendor=Digi-Key, Vendor PN=2725-LS10-13B24R3-ND
Q1 Q2 Q3 Q4: "MOSFET N-CH 600V 200MA SOT-223-4", Manufacturer="Fairchild Semiconductor", Manufacturer PN=FQT1N60CTF-WS, Vendor=Digikey, Vendor PN=FQT1N60CTF-WSCT-ND
R1 R2 R7: library part RMCF2010JT1K20, "1.2 kOhms ±5% 0.75W, 3/4W Chip Resistor 2010 (5025 Metric) Automotive AEC-Q200 Thick Film", Manufacturer="Stackpole Electionics Inc", Manufacturer PN=RMCF2010JT1K20, Vendor=Digi-Key, Vendor PN=RMCF2010JT1K20CT-ND
R3 R5 R8 R10: "RES SMD 1K OHM 0.1% 1/10W 0603", Manufacturer=Panasonic, Manufacturer PN=ERA-3AEB102V, Vendor=Digikey, Vendor PN=P1.0KDBCT-ND
R4 R6 R9 R11: "RES SMD 20K OHM 0.1% 1/10W 0603", Manufacturer=Panasonic, Manufacturer PN=ERA-3AEB203V, Vendor=Digikey, Vendor PN=P20KDBCT-ND
R12: library part AC03000006808JAC00, "6.8 Ohms ±5% 3W Through Hole Resistor Axial Flame Retardant Coating, Pulse Withstanding, Safety Wirewound", Manufacturer="Vishay Beyschlag/Draloric/BB Components", Manufacturer PN=AC03000006808JAC00, Vendor=Digi-Key, Vendor PN=749-AC03000006808JAC00CT-ND
T1 T2 T3 T4: library part "2961435 with R95-132", "Relay 2961435 with R95-132 socket for pcb mounting", Manufacturer="Phoenix Contact; NTE Electronics Inc", Manufacturer PN="2961435; R95-132", Vendor=Digi-Key, Vendor PN="277-5185-ND; 2368-R95-132-ND"
T5 T6: library part "2903677 with PY14-02", "General Purpose Relay 4PDT (4 Form C) 24VDC Coil Socketable with Socket", Manufacturer="Phoenix Contact; Omron Automation and Safety", Manufacturer PN="2903677; PY14-02", Vendor=Digi-Key, Vendor PN="277-11902-ND; Z813-ND"
U1 U2 U3 U4: library part 74LVC1G157GV,125, "Multiplexer 1 x 2:1 6-TSOP", Manufacturer="Nexperia USA Inc.", Manufacturer PN=74LVC1G157GV,125, Vendor=Digi-Key, Vendor PN=1727-3490-1-ND
V1: library part B72214S0351K101, "560 V 4.5 kA Varistor 1 Circuit Through Hole Disc 14mm", Manufacturer="EPCOS - TDK Electronics", Manufacturer PN=B72214S0351K101, Vendor=Digi-Key, Vendor PN=495-6464-ND

## Free pads (board coordinates)
  oct 6.35x6.35 hole 3.81: ""(17.12,5.08) ""(17.12,135.357) ""(17.653,70.218) ""(127.381,70.218) ""(127.66,5.08) ""(127.66,135.357)

## Via types
v1: diameter 0.508, hole 0.254, Top Layer to Bottom Layer, 11 vias

## Nets (pads, with @x,y where several pads share a name; then routed paths per layer and width w, separated by ;. In a path a pad name is that pad's centre, name@x,y a point inside that pad or via, vN(x,y) a via of type N, cw(c..) or ccw(c..) an arc to the next point about the centre after c; other vN are vias at no path point)
24V: C3.1 C4.2 D1.1 D2.1 D3.1 D4.1 D5.1 L1.2 R1.2 R2.2 R7.2 T1.8 T2.8 T3.8 T4.8 T5.1 T6.1 | length 220.4
  Top Layer w0.254: R7.2@37.186,74.181 R7.2@37.573,74.568
  Top Layer w0.762: R1.2 23.216,115.951 T1.8 39.472,103.505 44.64,103.505 45.212,104.076 D1.1 ; R7.2@36.932,74.93 37.198,75.197 37.198,79.248 37.198,80.571 37.338,80.71 37.338,85.623 T2.8 ; R7.2@37.186,74.181 R7.2 ; T3.8 40.64,53.213 43.116,55.689 43.116,55.753 43.156,55.792 D4.1@43.219,55.792 ; T2.8@37.706,85.712 38.989,86.995 43.752,86.995 44.323,87.566 D2.1 ; T5.1@70.04,71.804 70.04,82.233 70.612,82.804 L1.2@75.565,82.804 ; L1.2@75.565,83.058 L1.2 ; L1.2@75.565,83.439 75.819,83.693 81.288,83.693 81.407,83.812 C4.2 ; C4.2@81.407,83.809 81.526,83.69 85.347,83.69 D5.1 85.781,83.622 94.234,83.622 94.615,83.241 94.615,72.159 T6.1
  Bottom Layer w0.762: T1.8@37.2,101.966 T1.8 41.147,98.019 41.147,73.279 ; T3.8@37.567,53.694 T3.8 41.147,56.794 ; T2.8 38.989,85.852 41.085,83.756 ; T4.8@37.694,37.846 41.147,41.3 41.147,56.794 ; T5.1@70.131,72.29 67.056,69.215 45.211,69.215 41.147,73.279 ; 41.147,56.794 41.147,73.279
AC(L): F1.1 J2.1 | length 56.6
  Top Layer w0.762: J2.1@129.039,112.83 129.039,100.33 139.827,89.542 F1.1@139.827,60.706
AC(N): C6.2 J2.2 PS1.1 V1.2 | length 73.2
  Top Layer w0.762: J2.2@121.539,112.83 121.539,100.33 135.674,86.195 PS1.1 ; C6.2 130.004,59.817 V1.2 136.779,60.51 PS1.1@136.779,79.54
GND: C2.2 C3.2 C4.1 C5.2 D5.2 J1.8 J2.3 J6.2 PS1.5 Q1.3 Q2.3 Q3.3 Q4.3 R4.1 R6.1 R9.1 R11.1 U1.2 U1.3 U2.2 U2.3 U3.2 U3.3 U4.2 U4.3 | length 43.1
  Top Layer w0.254: Q4.3@42.786,73.266 42.799,73.279 v1(42.799,76.073) 42.848,76.122 42.848,77.455 U4.2 U4.3 U4.3@43.703,77.36 ; U4.3@44.031,77.537 44.049,77.555 45.539,77.555 45.924,77.94 R11.1 ; Q1.3@49.058,114.935 Q1.3 49.135,115.537 49.784,116.186 v1(49.784,116.967) U1.2 U1.3 50.734,118.788 50.907,118.961 R6.1 ; Q2.3 49.77,98.392 50.093,98.715 50.143,98.715 50.292,98.864 v1(50.292,99.847) 50.292,100.831 49.977,101.146 U2.2 U2.3 52.693,101.346 53.163,101.816 R4.1 ; Q3.3@58.501,88.723 58.501,92.283 U3.2 U3.3 61.202,92.456 61.545,92.799 R9.1 ; C4.1 81.407,85.609 81.78,85.982 81.83,85.982 84.077,88.229 D5.2 86.106,87.721 86.639,87.721 86.67,87.69 93.991,87.69 C3.2
  other v1: 60.579,92.456
"LJ VCC": J1.1 J6.1 U1.1 U1.5 U2.1 U2.5 U3.1 U3.5 U4.1 U4.5 | length 87.4
  Top Layer w0.254: U4.1@41.91,77.499 41.91,78.348 42.753,79.191 42.753,79.71 43.099,80.056 43.099,80.691 v1(48.641,86.233) 51.701,86.233 57.724,92.256 U3.1 57.897,92.629 57.897,93.148 58.674,93.925 U3.5 ; v1(48.641,106.045) 49.977,104.709 U2.5 49.804,103.523 49.804,103.004 49.027,102.227 U2.1 ; v1(48.641,116.967) 48.641,118.096 48.661,118.116 48.661,118.445 U1.1 48.834,119.499 49.611,120.276 49.611,120.795 U1.5 49.784,124.473 J1.1
  Layer 2 w0.254: v1(48.641,86.233) v1(48.641,116.967)
  Bottom Layer w0.254: J1.1 60.465,123.317 J6.1
NetC1_1: C1.1 PS1.3 | length 40.6
  Top Layer w0.762: C1.1 103.251,104.068 PS1.3
NetC1_2: C1.2 C5.1 PS1.4 | length 53.2
  Top Layer w0.762: C5.1@95.751,122.713 95.751,106.687 121.793,80.645 PS1.4
NetC2_1: C2.1 L1.1 PS1.6 | length 41.2
  Top Layer w0.762: L1.1@75.339,89.902 76.133,89.108 L1.1 77.502,89.902 95.917,89.902 98.679,87.14 ; C2.1@98.679,94.01 98.679,87.14 ; PS1.6 98.679,87.14
NetC6_1: C6.1 L2.1 R12.2 | length 19.4
  Top Layer w0.762: R12.2@111.061,42.862 L2.1@111.061,49.939 ; L2.1 122.889,50.118 123.19,49.817 C6.1
NetD1_2: D1.2 LED1.2 Q1.4 T1.1 | length 46.8
  Top Layer w0.254: LED1.2@7.366,104.14 24.511,104.14 v1(27.686,107.315)
  Top Layer w0.762: T1.1 37.821,108.839 44.64,108.839 45.244,108.236 D1.2 50.877,108.204 Q1.4
  Bottom Layer w0.254: v1(27.686,107.315) 29.464,109.093 T1.1
NetD2_2: D2.2 LED2.2 Q2.4 T2.1 | length 46.7
  Top Layer w0.254: LED2.2@7.277,90.297 34.519,90.297 T2.1
  Top Layer w0.762: T2.1@38.278,92.634 38.583,92.329 43.752,92.329 44.323,91.757 44.323,91.63 D2.2@44.895,91.059 ; D2.2 44.4,91.617 Q2.4
NetD3_2: D3.2 Q3.4 T5.2 T6.2 | length 50.4
  Top Layer w0.762: T5.2@56.777,71.868 56.65,71.995 56.65,78.748 59.614,81.712 59.614,81.879 60.158,82.423 D3.2 ; Q3.4 D3.2@66.117,82.473
  Bottom Layer w0.762: T5.2@56.777,71.868 59.585,74.676 78.898,74.676 T6.2
NetD4_2: D4.2 LED3.2 Q4.4 T3.1 T4.1 | length 61.7
  Top Layer w0.254: LED3.2 34.734,48.172 T4.1
  Top Layer w0.762: T4.1@37.694,45.339 35.306,47.727 35.306,58.445 T3.1 43.561,60.706 D4.2@43.815,60.452 ; D4.2 43.953,60.717 Q4.4@43.953,66.99
NetF1_2: F1.2 R12.1 V1.1 | length 17.5
  Top Layer w0.762: R12.1@130.857,42.94 130.857,48.688 V1.1 133.35,49.276 F1.2
NetJ1_5: J1.5 J6.4 U2.6 | length 47.6
  Top Layer w0.254: v1(47.625,106.045) 47.625,105.309 48.854,104.08 48.854,104.069 49.027,103.896 U2.6@49.038,103.896
  Layer 2 w0.254: J1.5 43.472,128.867 47.625,124.714 ; v1(47.625,106.045) 47.625,124.714 ; J6.4 63.627,119.507 52.832,119.507 47.625,124.714
NetJ1_6: J1.6 J6.6 U3.6 | length 66.7
  Top Layer w0.254: J1.6 40.703,132.402 41.588,133.286 54.043,133.286 57.724,129.605 ; U3.6 57.724,124.521 57.724,129.605 ; J6.6 64.654,123.56 63.769,123.56 57.724,129.605
NetJ1_12: J1.12 J6.3 U1.6 | length 29
  Top Layer w0.254: J1.12 44.856,128.88 v1(48.768,124.968) 48.801,124.935 U1.6@48.801,121.101
  Bottom Layer w0.254: v1(48.768,124.968) 55.499,118.237 J6.3
NetJ1_13: J1.13 J6.5 U4.6 | length 80
  Top Layer w0.254: U4.6@42.037,79.96 v1(42.037,82.55)
  Layer 2 w0.254: v1@42.062,82.575 J1.13@42.062,132.055
  Bottom Layer w0.254: v1(42.037,82.55) v1@42.062,82.575 ; J1.13@42.062,132.055 J1.13 42.334,132.08 44.831,129.583 44.831,128.939 47.786,125.984 49.022,125.984 52.832,122.174 63.5,122.174 J6.5
NetJ3_1: J3.1 T5.11 | length 38.1
  Top Layer w0.762: T5.11@70.082,55.013 J3.1
NetJ3_2: J3.2 T6.11 | length 28.8
  Bottom Layer w0.762: J3.2 94.779,30.898 T6.11@94.779,55.693
NetJ3_3: J3.3 T5.12 | length 36.1
  Top Layer w0.762: T5.12@65.587,55.317 86.868,34.036 J3.3
NetJ3_4: J3.4 T6.12 | length 30.5
  Bottom Layer w0.762: J3.4 89.871,36.15 T6.12@89.871,55.245
NetJ3_5: J3.5 T5.13 | length 33.8
  Top Layer w0.762: T5.13@60.944,55.351 76.708,39.587 J3.5
NetJ3_6: J3.6 T6.13 | length 32.9
  Bottom Layer w0.762: J3.6 85.471,41.91 T6.13@85.471,55.245
NetJ3_7: J3.7 T5.14 | length 31.4
  Top Layer w0.762: T5.14@56.896,55.48 56.896,37.719 J3.7
NetJ3_8: J3.8 T6.14 | length 36.4
  Bottom Layer w0.762: J3.8 61.74,28.419 63.262,28.419 81.579,46.736 T6.14
NetJ4_1: J4.1 T5.7 | length 83.2
  Top Layer w0.762: T5.7@69.923,58.982 96.012,32.893 135.636,32.893 J4.1
NetJ4_2: J4.2 T6.7 | length 66
  Bottom Layer w0.762: T6.7@94.596,59.709 97.663,56.642 97.663,35.687 101.6,31.75 131.699,31.75 J4.2
NetJ4_3: J4.3 T5.8 | length 128.7
  Top Layer w0.762: T5.8@65.369,59.19 61.949,62.611 54.483,62.611 51.435,59.563 51.435,30.988 58.547,23.876 125.857,23.876 J4.3
NetJ4_4: J4.4 T6.8 | length 131.6
  Bottom Layer w0.762: T6.8@90.455,58.77 90.455,58.798 89.228,60.026 89.199,60.026 85.465,63.76 78.111,63.76 75.184,60.833 75.184,54.483 57.023,36.322 57.023,26.082 59.229,23.876 120.777,23.876 J4.4
NetJ4_5: J4.5 T5.9 | length 108.8
  Top Layer w0.762: T5.9@61.177,59.218 59.292,61.103 55.273,61.103 52.705,58.535 52.705,31.496 59.309,24.892 116.713,24.892 J4.5
NetJ4_6: J4.6 T6.9 | length 111.6
  Bottom Layer w0.762: T6.9@85.321,59.967 82.544,62.744 78.746,62.744 76.2,60.198 76.2,54.062 58.039,35.901 58.039,26.503 59.65,24.892 111.887,24.892 114.935,27.94 J4.6
NetJ4_7: J4.7 T5.10 | length 88.4
  Top Layer w0.762: T5.10@57.239,59.652 53.975,56.388 53.975,32.004 60.071,25.908 107.569,25.908 J4.7
NetJ4_8: J4.8 T6.10 | length 88.9
  Bottom Layer w0.762: T6.10@81.676,59.442 77.216,54.982 77.216,53.641 59.055,35.48 59.055,26.924 60.071,25.908 102.409,25.908 J4.8
NetJ5_1: J5.1 T1.3 | length 60.5
  Bottom Layer w0.762: T1.3@18.408,109.467 24.003,115.062 J5.1
NetJ5_2: J5.2 T1.6 | length 69.7
  Bottom Layer w0.762: T1.6 18.034,101.6 29.21,112.776 79.375,112.776 J5.2
NetL2_2: L2.2 PS1.2 | length 37.4
  Top Layer w0.762: L2.2 111.252,66.929 121.285,76.962 127.491,76.962 PS1.2
NetLED1_1: LED1.1 R1.1 | length 11.6
  Top Layer w0.254: LED1.1@7.402,105.915 7.402,111.53 11.074,115.202 R1.1
NetLED2_1: LED2.1 R2.1 | length 31.1
  Top Layer w0.254: LED2.1 7.366,85.979 11.303,82.042 30.353,82.042 31.877,80.518 31.89,80.518 32.271,80.137 R2.1@32.271,78.981
NetLED3_1: LED3.1 R7.1 | length 45.6
  Top Layer w0.254: LED3.1 7.366,59.817 11.176,63.627 27.305,63.627 32.385,68.707 R7.1 R7.1@31.877,74.422
NetQ1_1: Q1.1 R5.1 | length 4.2
  Top Layer w0.254: Q1.1 54.058,115.335 54.058,115.965 54.102,116.009 54.102,118.707 R5.1
NetQ2_1: Q2.1 R3.1 | length 4.5
  Top Layer w0.254: Q2.1@54.35,97.591 54.693,97.934 54.693,101.543 54.966,101.816 R3.1
NetQ3_1: Q3.1 R8.1 | length 4.1
  Top Layer w0.254: Q3.1 63.246,88.836 R8.1
NetQ4_1: Q4.1 R10.1 | length 5.2
  Top Layer w0.254: Q4.1@47.371,72.915 47.708,73.252 47.708,77.769 R10.1
NetR3_2: R3.2 R4.2 U2.4 | length 4.4
  Top Layer w0.254: U2.4 52.883,103.696 53.163,103.416 R4.2 53.429,103.632 54.775,103.632 R3.2
NetR5_2: R5.2 R6.2 U1.4 | length 3.8
  Top Layer w0.254: U1.4 52.121,120.968 52.528,120.561 R6.2 R5.2
NetR8_2: R8.2 R9.2 U3.4 | length 4
  Top Layer w0.254: U3.4 59.624,94.779 59.797,94.606 61.388,94.606 R9.2 61.811,94.615 63.03,94.615 R8.2
NetR10_2: R10.2 R11.2 U4.4 | length 4.2
  Top Layer w0.254: U4.4 43.876,79.713 44.049,79.54 R11.2 R10.2
NetT1_4: T1.4 T2.3 | length 17.7
  Bottom Layer w0.762: T1.4@12.761,109.032 14.859,106.934 14.859,101.624 16.497,99.985 16.497,94.68 17.577,93.601 T2.3
NetT1_5: T1.5 T2.6 | length 17.8
  Bottom Layer w0.762: T1.5 15.24,98.933 15.24,88.445 17.577,86.108 T2.6
NetT2_2: T2.2 T4.6 | length 60.9
  Bottom Layer w0.762: T4.6@17.704,37.846 17.909,37.846 26.416,46.353 26.416,89.408 T2.2@22.445,93.379
NetT2_4: T2.4 T4.3 | length 53.3
  Bottom Layer w0.762: T2.4 8.763,89.535 8.763,54.28 T4.3@17.704,45.339
NetT2_5: T2.5 T3.3 | length 29.3
  Bottom Layer w0.762: T2.5@12.94,86.219 10.668,83.947 10.668,67.615 T3.3
NetT2_7: T2.7 T3.6 | length 36.4
  Bottom Layer w0.762: T3.6 17.782,53.213 24.486,59.917 24.486,83.947 T2.7
NetT3_2: T3.2 T5.4 | length 46.6
  Layer 2 w0.762: T3.2 29.405,67.53 63.692,67.53 T5.4
NetT3_4: T3.4 T5.6 | length 48.9
  Layer 2 w0.762: T3.4 15.621,57.658 22.227,57.658 30.228,65.659 T5.6@56.902,65.659
NetT3_5: T3.5 T5.5 | length 54.3
  Layer 2 w0.762: T3.5 12.573,53.494 14.197,55.118 22.225,55.118 30.861,63.754 59.286,63.754 T5.5@61.469,65.937
NetT3_7: T3.7 T5.3 | length 52.5
  Layer 2 w0.762: T3.7 28.169,58.801 46.228,58.801 49.276,61.849 66.181,61.849 T5.3
NetT4_2: T4.2 T6.4 | length 77.4
  Layer 2 w0.762: T4.2 24.867,47.625 51.181,47.625 54.356,50.8 72.517,50.8 79.375,57.658 79.375,60.706 82.423,63.754 88.362,63.754 89.886,65.278 T6.4@89.886,65.375
NetT4_4: T4.4 T6.6 | length 79.6
  Layer 2 w0.762: T4.4@12.7,45.339 16.129,48.768 50.419,48.768 53.721,52.07 71.755,52.07 77.978,58.293 77.978,62.044 T6.6@81.628,65.694
NetT4_5: T4.5 T6.5 | length 99.1
  Layer 2 w0.762: T4.5@12.7,37.846 10.033,40.513 10.033,46.482 13.589,50.038 49.958,50.038 53.26,53.34 71.247,53.34 76.708,58.801 76.708,64.945 79.708,67.945 83.679,67.945 T6.5
NetT4_7: T4.7 T6.3 | length 84.9
  Layer 2 w0.762: T4.7 27.788,43.053 66.721,43.053 80.798,57.13 82.03,57.13 84.094,59.194 84.094,61.234 85.217,62.357 91.491,62.357 T6.3
pads on no net: J1.0 J1.2 J1.3 J1.4 J1.7 J1.9 J1.10 J1.11 J1.14 J1.15 Q1.2 Q2.2 Q3.2 Q4.2 T1.2 T1.7

## Polygon pours and split planes (outlines as drawn)
GND on Ground "NONET_L-01_P-001" (solid, pour order 0): 9.271,43.942 9.271,133.731 137.795,133.731 137.795,70.104 111.633,43.942

## Other copper
Top Layer:
  region: 631 vertices and 1 holes, not listed, extent 8.736,20.794 19.662,31.72
  region: 17.444,27.688 17.888,27.688 17.888,27.124 10.51,27.124 10.51,27.688 17.404,27.688
  region: 12.768,24.866 12.163,24.866 12.163,25.995 11.598,25.995 11.598,24.866 10.51,24.866 10.51,25.39 10.55,25.39 10.55,25.43 11.034,25.43 11.034,26.559 12.727,26.559 12.727,25.43 13.292,25.43 13.292,26.519 13.332,26.519 13.332,26.559 14.985,26.559 14.985,25.43 15.59,25.43 15.59,25.471 15.549,25.471 15.549,25.511 15.59,25.511 15.59,26.438 15.549,26.438 15.549,26.519 15.59,26.519 15.59,26.559 17.243,26.559 17.243,25.43 17.888,25.43 17.888,24.866 16.718,24.866 16.718,25.995 16.114,25.995 16.114,24.866 14.42,24.866 14.42,25.995 13.856,25.995 13.856,24.866 12.808,24.866

## Silkscreen, mask and mechanical layers (free items; w line width, h text height)
Top Overlay:
  drawing of 43 lines, arcs and shapes, not listed
  text "GND" at 115.409,124.206 h3.05 r90
  text "AC(N)" at 122.695,124.206 h3.05 r90
  text "AC(L)" at 129.98,124.206 h3.05 r90
  text "Pos" at 77.82,123.952 h3.05 r90
  text "Neg" at 82.612,123.952 h3.05 r90
  text "LJ VCC" at 56.007,122.826 h1.52
  text "EIO4" at 66.675,122.826 h1.52
  text "GND" at 57.658,120.286 h1.52
  text "EIO3" at 66.675,120.286 h1.52
  text "EIO1" at 57.785,117.746 h1.52
  text "EIO2" at 66.675,117.746 h1.52
  text "Aux. Conn." at 60.008,114.935 h1.52
  text "LabJack Controls / T1 - EIO1 / T2 - EIO2 / T3/T4 - EIO3 / T5/T6 - EIO4" at 25.908,113.777 h2.54
  text "Designed for use with BUD Box NBB-10261" at 2.285,104.394 h2.03 r90
  text "OUTPUT" at 70.787,103.822 h3.81
  text "INPUT" at 61.151,34.989 h3.81
  text "CH1 Pos" at 61.821,10.795 h2.54 r90
  text "CH2 Pos" at 72.042,10.795 h2.54 r90
  text "CH3 Pos" at 82.264,10.795 h2.54 r90
  text "CH4 Pos" at 92.486,10.795 h2.54 r90
  text "CH5 Pos" at 105.001,10.795 h2.54 r90
  text "CH6 Pos" at 115.222,10.795 h2.54 r90
  text "CH7 Pos" at 125.444,10.795 h2.54 r90
  text "CH8 Pos" at 135.666,10.795 h2.54 r90
  text "CH1 Neg" at 67.156,10.702 h2.54 r90
  text "CH2 Neg" at 77.378,10.702 h2.54 r90
  text "CH3 Neg" at 87.599,10.702 h2.54 r90
  text "CH5 Neg" at 110.336,10.702 h2.54 r90
  text "CH6 Neg" at 120.558,10.702 h2.54 r90
  text "CH7 Neg" at 130.779,10.702 h2.54 r90
  text "CH4 Neg" at 97.821,10.668 h2.54 r90
  text "CH8 Neg" at 141.001,10.668 h2.54 r90
  text "ETX8 CHANNEL SWITCHER / DTB-222-AW1 / JUNE 2023" at 21.463,9.373 h3.05
Top Solder:
  drawing of 3 lines, arcs and shapes, not listed
Mechanical 1:
  the board outline again, w0.254